# Allegro board ACU7EV.brd
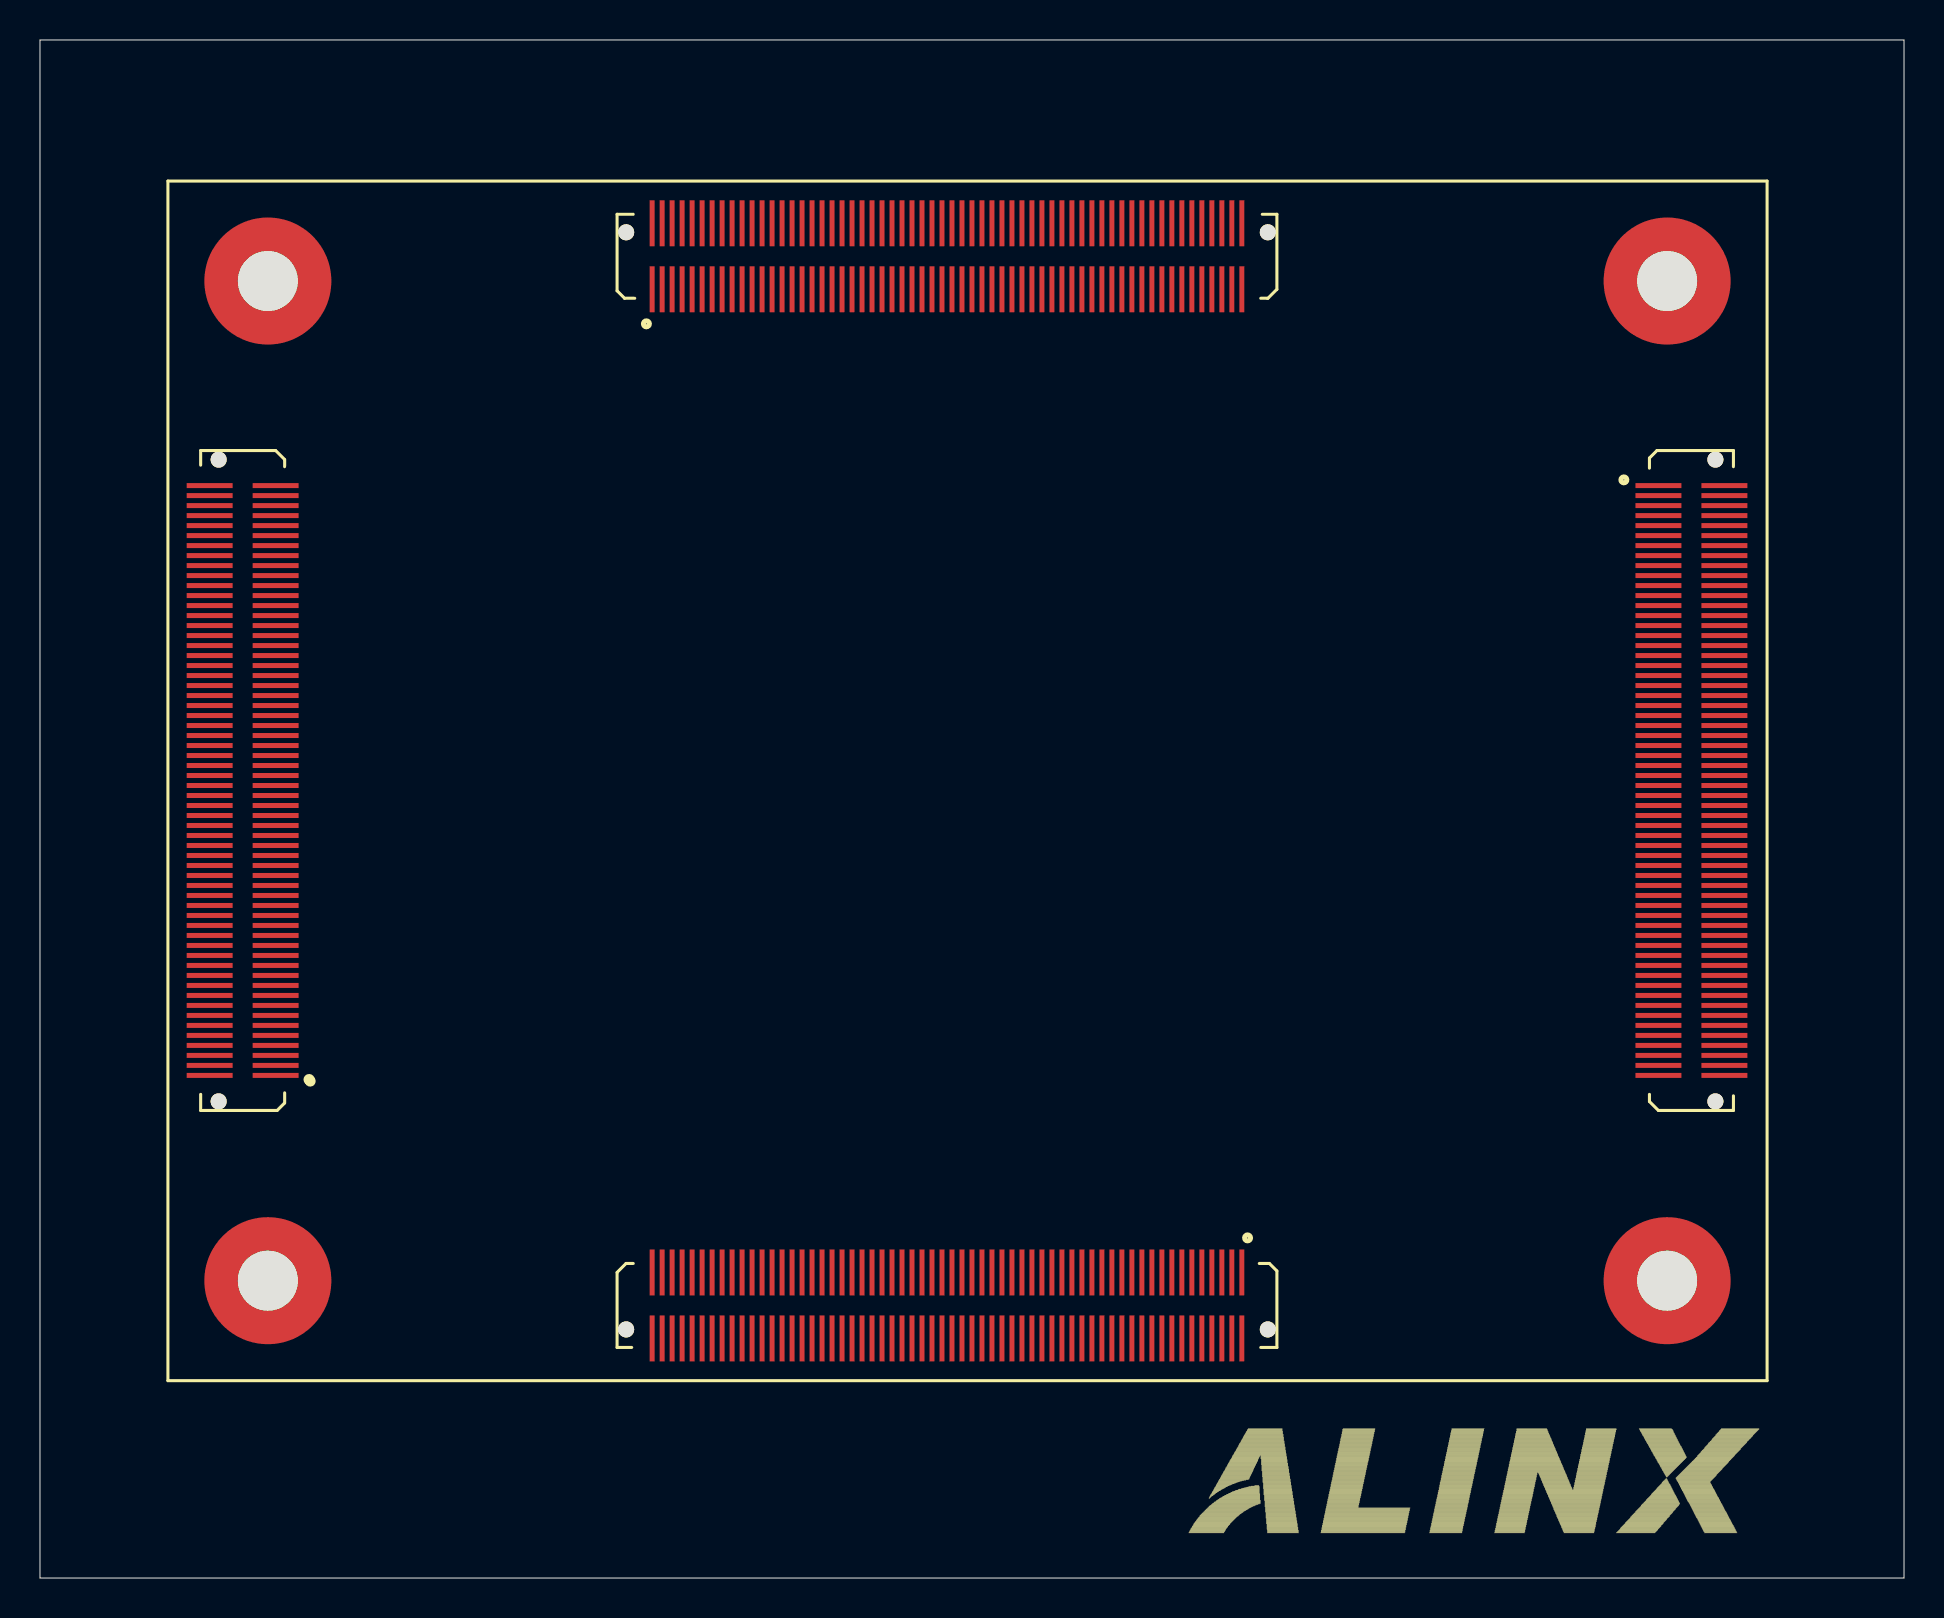
[diagram p0: board, top side]
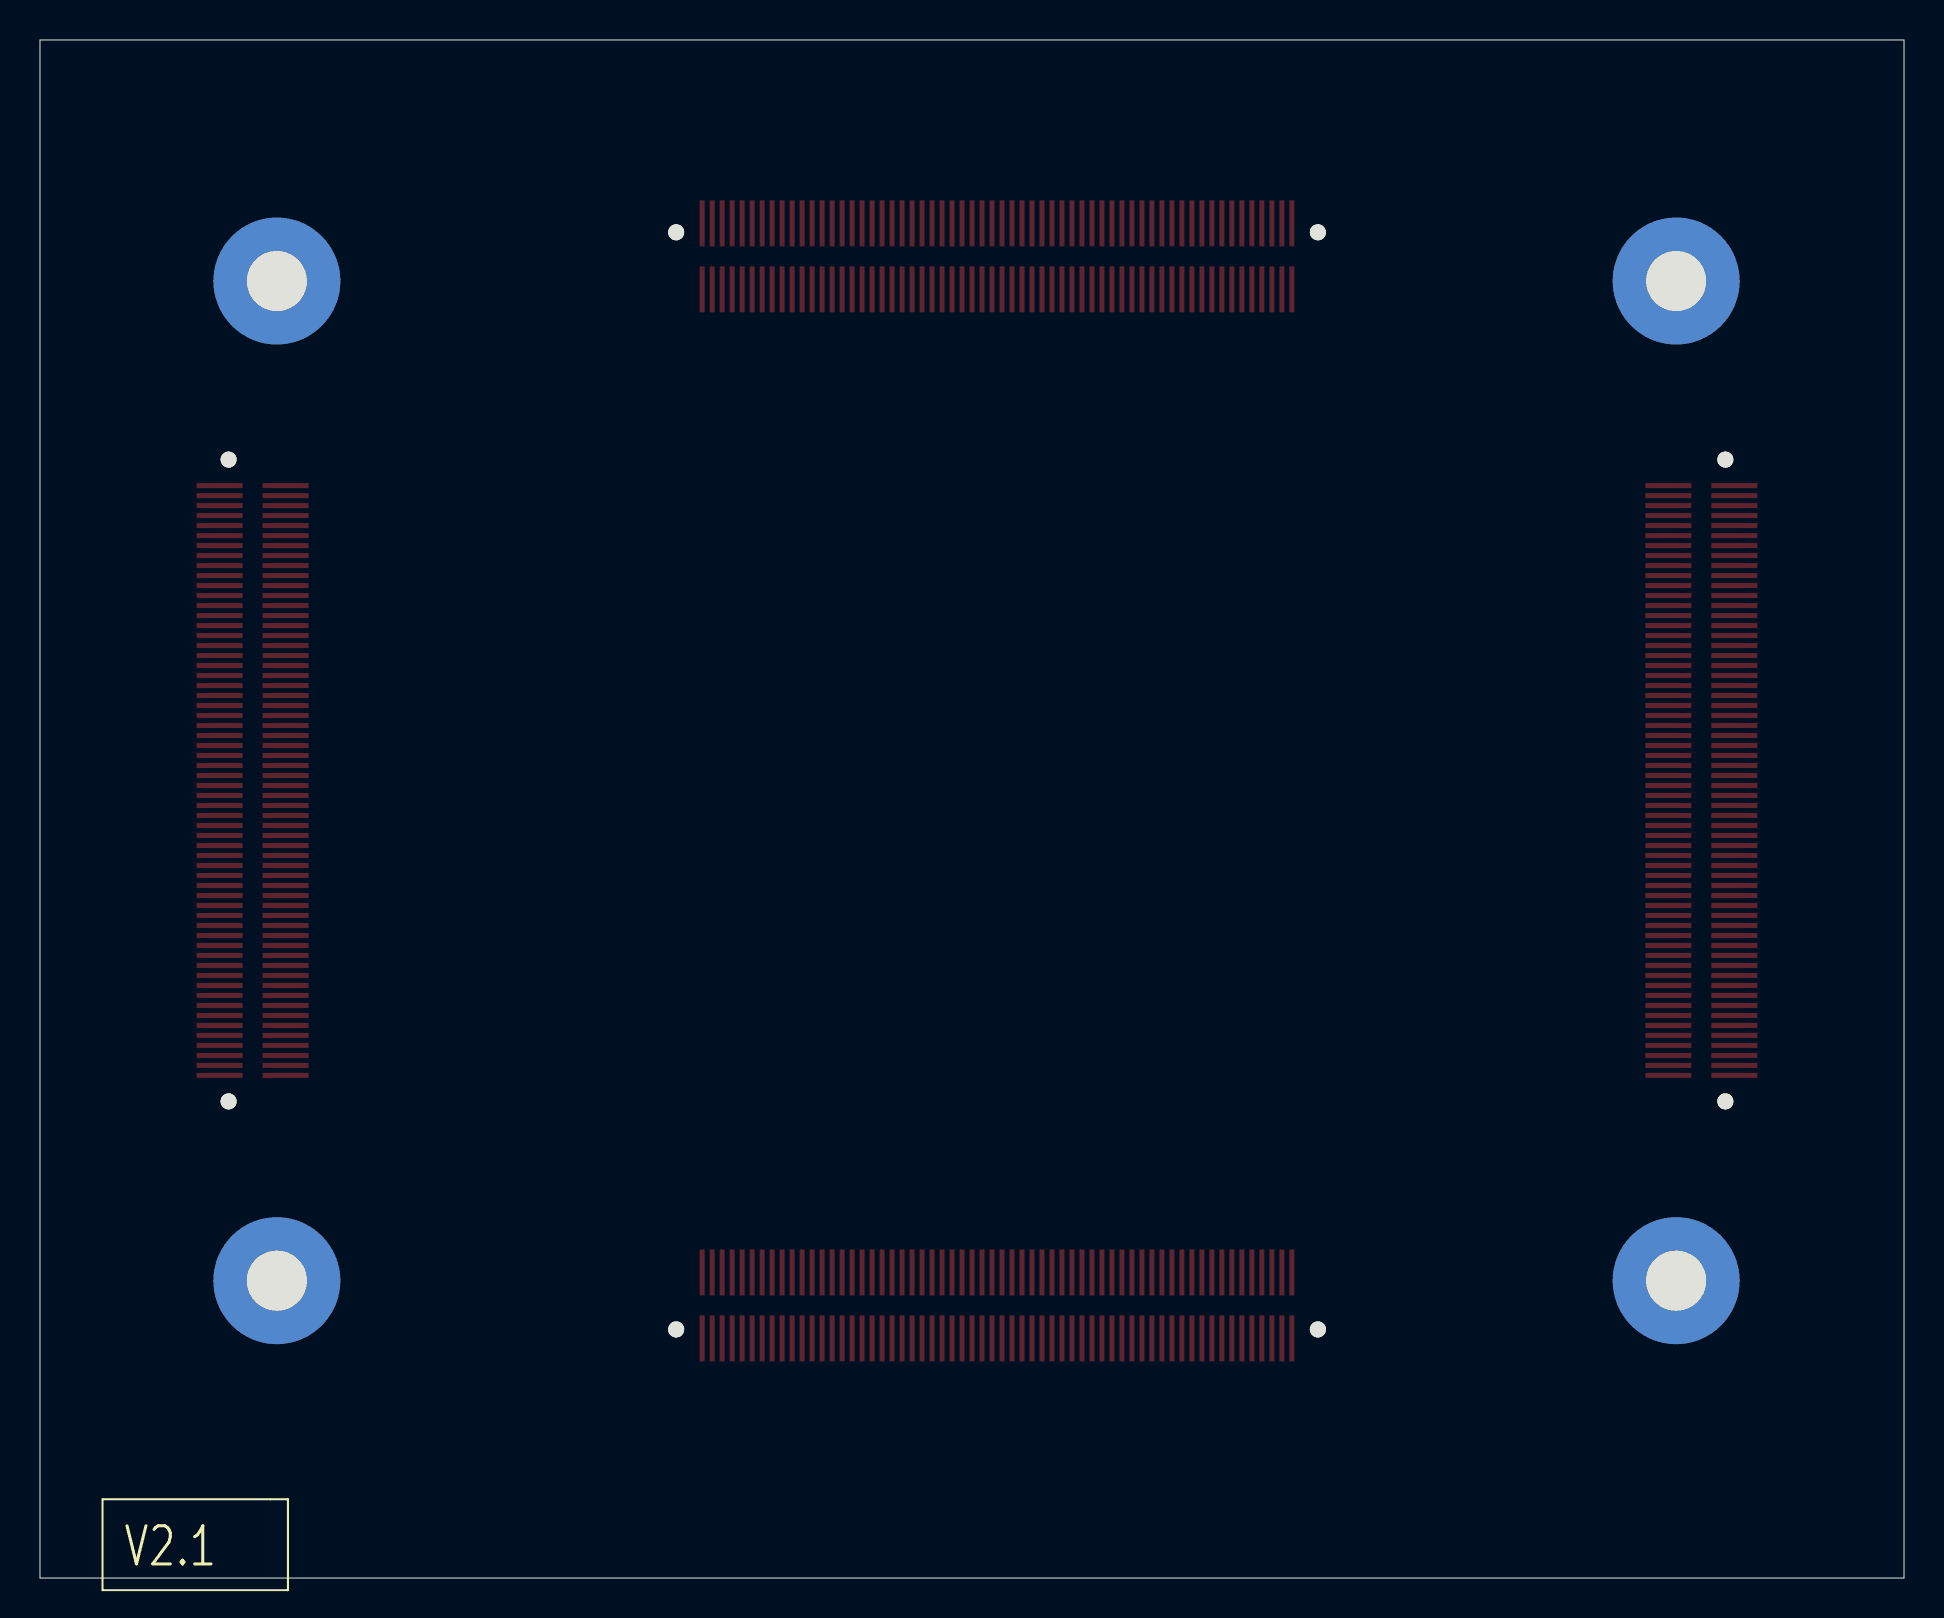
[diagram p1: board, bottom side, seen from below]

Outline 93.25 x 76.93 mm; copper layers: TOP, L2_GND, L3_SIG, L4_GND, L5_VCC, L6_SIG, L7_GND, BOTTOM. Coordinates in mm from the lower left corner of the outline.
Outline path: 0,76.93 93.25,76.93 93.25,0 0,0 0,76.93

## Design rules (mm)
net group 90OHM: nets OTG_D_N OTG_D_P
net group 225_SFP_CLKN: nets 225_SFP_CLKN N24547372
net group 225_SFP_CLKP: nets 225_SFP_CLKP N24547389
net group 485_1: nets 485_A1 485_B1
net group 485_2: nets 485_A2 485_B2
net group 505_DP_CLKN: nets 505_DP_CLKN N25916931
net group 505_DP_CLKP: nets 505_DP_CLKP N25916928
net group 505_PCIE_REFCLK: nets 505_PCIE_REFCLK_N 505_PCIE_REFCLK_P
net group 505_USB_CLKN: nets 505_USB_CLKN N24545544
net group 505_USB_CLKP: nets 505_USB_CLKP N24545542
net group CAN1: nets CAN1_CANH CAN1_CANL
net group CAN2: nets CAN2_CANH CAN2_CANL
net group DPAUX: nets DPAUX_N DPAUX_P
net group FMC_CLK0: nets FMC_CLK0_N FMC_CLK0_P
net group FMC_CLK1: nets FMC_CLK1_N FMC_CLK1_P
net group FMC_DP0_C2M: nets FMC_DP0_C2M_N FMC_DP0_C2M_P
net group FMC_DP0_M2C: nets FMC_DP0_M2C_N FMC_DP0_M2C_P
net group FMC_GBTCLK0_M2C: nets FMC_GBTCLK0_M2C_N FMC_GBTCLK0_M2C_P
net group FMC_LA00_CC: nets FMC_LA00_CC_N FMC_LA00_CC_P
net group FMC_LA01_CC: nets FMC_LA01_CC_N FMC_LA01_CC_P
net group FMC_LA02: nets FMC_LA02_N FMC_LA02_P
net group FMC_LA03: nets FMC_LA03_N FMC_LA03_P
net group FMC_LA04: nets FMC_LA04_N FMC_LA04_P
net group FMC_LA05: nets FMC_LA05_N FMC_LA05_P
net group FMC_LA06: nets FMC_LA06_N FMC_LA06_P
net group FMC_LA07: nets FMC_LA07_N FMC_LA07_P
net group FMC_LA08: nets FMC_LA08_N FMC_LA08_P
net group FMC_LA09: nets FMC_LA09_N FMC_LA09_P
net group FMC_LA10: nets FMC_LA10_N FMC_LA10_P
net group FMC_LA11: nets FMC_LA11_N FMC_LA11_P
net group FMC_LA12: nets FMC_LA12_N FMC_LA12_P
net group FMC_LA13: nets FMC_LA13_N FMC_LA13_P
net group FMC_LA14: nets FMC_LA14_N FMC_LA14_P
net group FMC_LA15: nets FMC_LA15_N FMC_LA15_P
net group FMC_LA16: nets FMC_LA16_N FMC_LA16_P
net group FMC_LA17_CC: nets FMC_LA17_CC_N FMC_LA17_CC_P
net group FMC_LA18_CC: nets FMC_LA18_CC_N FMC_LA18_CC_P
net group FMC_LA19: nets FMC_LA19_N FMC_LA19_P
net group FMC_LA20: nets FMC_LA20_N FMC_LA20_P
net group FMC_LA21: nets FMC_LA21_N FMC_LA21_P
net group FMC_LA22: nets FMC_LA22_N FMC_LA22_P
net group FMC_LA23: nets FMC_LA23_N FMC_LA23_P
net group FMC_LA24: nets FMC_LA24_N FMC_LA24_P
net group FMC_LA25: nets FMC_LA25_N FMC_LA25_P
net group FMC_LA26: nets FMC_LA26_N FMC_LA26_P
net group FMC_LA27: nets FMC_LA27_N FMC_LA27_P
net group FMC_LA28: nets FMC_LA28_N FMC_LA28_P
net group FMC_LA29: nets FMC_LA29_N FMC_LA29_P
net group FMC_LA30: nets FMC_LA30_N FMC_LA30_P
net group FMC_LA31: nets FMC_LA31_N FMC_LA31_P
net group FMC_LA32: nets FMC_LA32_N FMC_LA32_P
net group FMC_LA33: nets FMC_LA33_N FMC_LA33_P
net group GT0_DP_TX: nets GT0_DP_TX_N GT0_DP_TX_P
net group GT0_DP_TX_C: nets GT0_DP_TX_C_N GT0_DP_TX_C_P
net group GT1_DP_TX: nets GT1_DP_TX_N GT1_DP_TX_P
net group GT1_DP_TX_C: nets GT1_DP_TX_C_N GT1_DP_TX_C_P
net group HDMI0_RX_0: nets HDMI0_RX_0N HDMI0_RX_0P
net group HDMI0_RX_1: nets HDMI0_RX_1N HDMI0_RX_1P
net group HDMI0_RX_2: nets HDMI0_RX_2N HDMI0_RX_2P
net group HDMI0_RX_C: nets HDMI0_RX_CN HDMI0_RX_CP
net group HDMI_DRU_CLOCK_N: nets HDMI_DRU_CLOCK_N N25296078
net group HDMI_DRU_CLOCK_P: nets HDMI_DRU_CLOCK_P N25296083
net group HDMI_IN0_RX_0N: nets HDMI_IN0_RX_0N N25309248
net group HDMI_IN0_RX_0P: nets HDMI_IN0_RX_0P N25309240
net group HDMI_IN0_RX_1N: nets HDMI_IN0_RX_1N N25309242
net group HDMI_IN0_RX_1P: nets HDMI_IN0_RX_1P N25309234
net group HDMI_IN0_RX_2N: nets HDMI_IN0_RX_2N N25309236
net group HDMI_IN0_RX_2P: nets HDMI_IN0_RX_2P N25309238
net group HDMI_REC_CLOCK: nets HDMI_REC_CLOCK_N HDMI_REC_CLOCK_P
net group HDMI_TX0_D0N: nets HDMI_TX0_D0N N25297089
net group HDMI_TX0_D0P: nets HDMI_TX0_D0P N25297084
net group HDMI_TX0_D1N: nets HDMI_TX0_D1N N25297081
net group HDMI_TX0_D1P: nets HDMI_TX0_D1P N25297080
net group HDMI_TX0_D2N: nets HDMI_TX0_D2N N25297061
net group HDMI_TX0_D2P: nets HDMI_TX0_D2P N25297074
net group HDMI_TX_LVDS_OUT_N: nets HDMI_TX_LVDS_OUT_N N25297095
net group HDMI_TX_LVDS_OUT_P: nets HDMI_TX_LVDS_OUT_P N25297094
net group MIPI_CLK: nets MIPI_CLK_N MIPI_CLK_P
net group MIPI_LAN0: nets MIPI_LAN0_N MIPI_LAN0_P
net group MIPI_LAN1: nets MIPI_LAN1_N MIPI_LAN1_P
net group PCIE_CLK_N: nets N25208409 PCIE_CLK_N
net group PCIE_CLK_P: nets N25208411 PCIE_CLK_P
net group PCIE_REFCLK: nets PCIE_REFCLK_N PCIE_REFCLK_P
net group PCIE_RX: nets PCIE_RX_N PCIE_RX_P
net group PCIE_TX: nets PCIE_TX_N PCIE_TX_P
net group PCIE_TX0_N: nets N25208362 PCIE_TX0_N
net group PCIE_TX0_P: nets N25208364 PCIE_TX0_P
net group PCIE_TX1_N: nets N25208366 PCIE_TX1_N
net group PCIE_TX1_P: nets N25208368 PCIE_TX1_P
net group PCIE_TX2_N: nets N25208370 PCIE_TX2_N
net group PCIE_TX2_P: nets N25208372 PCIE_TX2_P
net group PCIE_TX3_N: nets N25208374 PCIE_TX3_N
net group PCIE_TX3_P: nets N25208376 PCIE_TX3_P
net group PCIE_TX4_N: nets N25208593 PCIE_TX4_N
net group PCIE_TX4_P: nets N25208595 PCIE_TX4_P
net group PCIE_TX5_N: nets N25208619 PCIE_TX5_N
net group PCIE_TX5_P: nets N25208637 PCIE_TX5_P
net group PCIE_TX6_N: nets N25208653 PCIE_TX6_N
net group PCIE_TX6_P: nets N25208655 PCIE_TX6_P
net group PCIE_TX7_N: nets N25208669 PCIE_TX7_N
net group PCIE_TX7_P: nets N25208689 PCIE_TX7_P
net group PCIE_TX_C: nets PCIE_TX_C_N PCIE_TX_C_P
net group PHY_MDI0_N: nets PHY1_MDI0_N PHY1_MDI0_P
net group RX_DS1: nets RX_DS1_N RX_DS1_P
net group RX_DS2: nets RX_DS2_N RX_DS2_P
net group RX_DS3: nets RX_DS3_N RX_DS3_P
net group RX_DS4: nets RX_DS4_N RX_DS4_P
net group TX_0: nets TX_0N TX_0P
net group TX_1: nets TX_1N TX_1P
net group TX_2: nets TX_2N TX_2P
net group TX_C: nets TX_CN TX_CP
net group TX_DS1: nets TX_DS1_N TX_DS1_P
net group TX_DS1_C: nets TX_DS1_C_N TX_DS1_C_P
net group TX_DS2: nets TX_DS2_N TX_DS2_P
net group TX_DS2_C: nets TX_DS2_C_N TX_DS2_C_P
net group TX_DS3: nets TX_DS3_N TX_DS3_P
net group TX_DS3_C: nets TX_DS3_C_N TX_DS3_C_P
net group TX_DS4: nets TX_DS4_N TX_DS4_P
net group TX_DS4_C: nets TX_DS4_C_N TX_DS4_C_P
net group UART_PL: nets N23663238 N23663240
net group USB: nets N16523963 N16524061
net group USB_D0: nets USB_DM0 USB_DP0
net group USB_D1: nets USB_DM1 USB_DP1
net group USB_D2: nets USB_DM2 USB_DP2
net group USB_D3: nets USB_DM3 USB_DP3
net group USB_D4: nets USB_DM4 USB_DP4
net group USB_RXN_UP: nets USB_RXN_UP USB_SSRXN
net group USB_RXP_UP: nets USB_RXP_UP USB_SSRXP
net group USB_SSTXN: nets USB_SSTXN USB_TXN_UP
net group USB_SSTXP: nets USB_SSTXP USB_TXP_UP
net group Y3: nets N25043434 N25043442
net group Y4: nets N25044098 N25044106
net group Y6: nets N24545912 N24545918
net group Y7: nets N25342525 N25342533
net group Y8: nets N25639880 N25639886
net group ETH_RX: nets PHY1_RXCK PHY1_RXCTL PHY1_RXD0 PHY1_RXD1 PHY1_RXD2 PHY1_RXD3 PHY2_RXCK PHY2_RXCTL PHY2_RXD0 PHY2_RXD1 PHY2_RXD2 PHY2_RXD3
net group ETH_TX: nets PHY1_TXCK PHY1_TXCTL PHY1_TXD0 PHY1_TXD1 PHY1_TXD2 PHY1_TXD3 PHY2_TXCK PHY2_TXCTL PHY2_TXD0 PHY2_TXD1 PHY2_TXD2 PHY2_TXD3
net group HDMI_8T49N241_OUT_N: nets HDMI_8T49N241_OUT_N N25344461 N25641497
net group HDMI_8T49N241_OUT_P: nets HDMI_8T49N241_OUT_P N25344453 N25641494
net group HDMI_IN0_RX_CLKN: nets HDMI_IN0_RX_CLKN
net group HDMI_IN0_RX_CLKP: nets HDMI_IN0_RX_CLKP
net group IO1-DIFF: nets FAN_PWM
net group OTG_DATA: nets USB_CLK USB_DATA0 USB_DATA1 USB_DATA2 USB_DATA3 USB_DATA4 USB_DATA5 USB_DATA6 USB_DATA7 USB_DIR USB_NXT USB_STP
net group PCIE: nets PCIE_RX0_N PCIE_RX0_P PCIE_RX1_N PCIE_RX1_P PCIE_RX2_N PCIE_RX2_P PCIE_RX3_N PCIE_RX3_P PCIE_RX4_N PCIE_RX4_P PCIE_RX5_N PCIE_RX5_P PCIE_RX6_N PCIE_RX6_P PCIE_RX7_N PCIE_RX7_P
net group PHY_MDI: nets PHY1_MDI1_N PHY1_MDI1_P PHY1_MDI2_N PHY1_MDI2_P PHY1_MDI3_N PHY1_MDI3_P PHY2_MDI0_N PHY2_MDI0_P PHY2_MDI1_N PHY2_MDI1_P PHY2_MDI2_N PHY2_MDI2_P PHY2_MDI3_N PHY2_MDI3_P
net group SD_D: nets SD_CLK SD_CMD SD_D0 SD_D1 SD_D2 SD_D3
net group SPF-DIFF: nets SFP1_RX_N SFP1_RX_P SFP1_TX_N SFP1_TX_P SFP2_RX_N SFP2_RX_P SFP2_TX_N SFP2_TX_P
nets with their own width: min track width 0.254; nets +3.3V

## Placement (name value [footprint] x y rotation side)
J29  -  [AXK6A2337YG]  45.37 66.11 0 top
J30  -  [AXK6A2337YG]  82.61 39.89 270 top
J31  -  [AXK6A2337YG]  45.37 13.63 180 top
J32  -  [AXK6A2337YG]  10.14 39.89 90 top
NOREF  -  [unnamed]  46.4 39.87 180 top
NOREF#2  -  [#2]  160.62 -1.73 90 top
NOREF#3  -  [#2]  -53.24 95.75 0 top

## Library data of the parts
J29-J32 = CONN SOCKET 60x2_0

## Footprints (pads in the part's own frame, mm; a bottom-side part is the same pattern mirrored in y, then rotated)
AXK6A2337YG
  round 0.8 hole 0.8 unplated: (-16.05,1.2) (16.05,1.2)
  rect 0.25x2.3 smd: 1(-14.75,-1.65) 2(-14.75,1.65) 3(-14.25,-1.65) 4(-14.25,1.65) 5(-13.75,-1.65) 6(-13.75,1.65) 7(-13.25,-1.65) 8(-13.25,1.65) 9(-12.75,-1.65) 10(-12.75,1.65) 11(-12.25,-1.65) 12(-12.25,1.65) 13(-11.75,-1.65) 14(-11.75,1.65) 15(-11.25,-1.65) 16(-11.25,1.65) 17(-10.75,-1.65) 18(-10.75,1.65) 19(-10.25,-1.65) 20(-10.25,1.65) 21(-9.75,-1.65) 22(-9.75,1.65) 23(-9.25,-1.65) 24(-9.25,1.65) 25(-8.75,-1.65) 26(-8.75,1.65) 27(-8.25,-1.65) 28(-8.25,1.65) 29(-7.75,-1.65) 30(-7.75,1.65) 31(-7.25,-1.65) 32(-7.25,1.65) 33(-6.75,-1.65) 34(-6.75,1.65) 35(-6.25,-1.65) 36(-6.25,1.65) 37(-5.75,-1.65) 38(-5.75,1.65) 39(-5.25,-1.65) 40(-5.25,1.65) 41(-4.75,-1.65) 42(-4.75,1.65) 43(-4.25,-1.65) 44(-4.25,1.65) 45(-3.75,-1.65) 46(-3.75,1.65) 47(-3.25,-1.65) 48(-3.25,1.65) 49(-2.75,-1.65) 50(-2.75,1.65) 51(-2.25,-1.65) 52(-2.25,1.65) 53(-1.75,-1.65) 54(-1.75,1.65) 55(-1.25,-1.65) 56(-1.25,1.65) 57(-0.75,-1.65) 58(-0.75,1.65) 59(-0.25,-1.65) 60(-0.25,1.65) 61(0.25,-1.65) 62(0.25,1.65) 63(0.75,-1.65) 64(0.75,1.65) 65(1.25,-1.65) 66(1.25,1.65) 67(1.75,-1.65) 68(1.75,1.65) 69(2.25,-1.65) 70(2.25,1.65) 71(2.75,-1.65) 72(2.75,1.65) 73(3.25,-1.65) 74(3.25,1.65) 75(3.75,-1.65) 76(3.75,1.65) 77(4.25,-1.65) 78(4.25,1.65) 79(4.75,-1.65) 80(4.75,1.65) 81(5.25,-1.65) 82(5.25,1.65) 83(5.75,-1.65) 84(5.75,1.65) 85(6.25,-1.65) 86(6.25,1.65) 87(6.75,-1.65) 88(6.75,1.65) 89(7.25,-1.65) 90(7.25,1.65) 91(7.75,-1.65) 92(7.75,1.65) 93(8.25,-1.65) 94(8.25,1.65) 95(8.75,-1.65) 96(8.75,1.65) 97(9.25,-1.65) 98(9.25,1.65) 99(9.75,-1.65) 100(9.75,1.65) 101(10.25,-1.65) 102(10.25,1.65) 103(10.75,-1.65) 104(10.75,1.65) 105(11.25,-1.65) 106(11.25,1.65) 107(11.75,-1.65) 108(11.75,1.65) 109(12.25,-1.65) 110(12.25,1.65) 111(12.75,-1.65) 112(12.75,1.65) 113(13.25,-1.65) 114(13.25,1.65) 115(13.75,-1.65) 116(13.75,1.65) 117(14.25,-1.65) 118(14.25,1.65) 119(14.75,-1.65) 120(14.75,1.65)
unnamed
  round 6.35 hole 3: 1(-35,25) 2(35,25) 3(-35,-25) 4(35,-25)

## Nets
+12V: J29.1 J29.2(61) J29.3(2) J29.4(62) J29.5(3) J29.6(63) J29.7(4) J29.8(64) J29.9(5) J29.10(65) J29.11(6) J29.12(66)
GND: J29.13(7) J29.14(67) J29.19(10) J29.20(70) J29.29(15) J29.30(75) J29.39(20) J29.40(80) J29.49(25) J29.50(85) J29.59(30) J29.60(90) J29.69(35) J29.70(95) J29.79(40) J29.80(100) J29.89(45) J29.90(105) J29.99(50) J29.100(110) J30.5(3) J30.6(63) J30.15(8) J30.16(68) J30.25(13) J30.26(73) J30.35(18) J30.36(78) J30.45(23) J30.46(83) J30.55(28) J30.56(88) J30.65(33) J30.66(93) J30.75(38) J30.76(98) J30.85(43) J30.86(103) J30.91(46) J30.92(106) J30.97(49) J30.98(109) J30.103(52) J30.104(112) J30.109(55) J30.110(115) J30.115(58) J30.116(118) J31.11(6) J31.12(66) J31.21(11) J31.22(71) J31.31(16) J31.32(76) J31.41(21) J31.42(81) J31.51(26) J31.52(86) J31.61(31) J31.62(91) J31.71(36) J31.72(96) J31.81(41) J31.82(101) J31.91(46) J31.92(106) J31.101(51) J31.102(111) J31.111(56) J31.112(116) J32.5(3) J32.6(63) J32.11(6) J32.12(66) J32.17(9) J32.18(69) J32.23(12) J32.24(72) J32.29(15) J32.30(75) J32.35(18) J32.36(78) J32.41(21) J32.42(81) J32.47(24) J32.48(84) J32.53(27) J32.54(87) J32.59(30) J32.60(90) J32.65(33) J32.66(93) J32.71(36) J32.72(96) J32.77(39) J32.78(99) J32.83(42) J32.84(102) J32.89(45) J32.90(105) J32.95(48) J32.96(108) J32.101(51) J32.102(111) J32.107(54) J32.108(114) J32.113(57) J32.114(117) J32.119(60) J32.120
VBAT_IN: J31.2(61)
8T49N241_INT_ALM: J29.41(21)
8T49N241_LOL: J29.43(22)
8T49N241_RST: J29.37(19)
223_CLK1_N: J32.27(14)
223_CLK1_P: J32.25(13)
224_CLK0_N: J32.58(89)
224_CLK0_P: J32.56(88)
224_CLK1_N: J32.57(29)
224_CLK1_P: J32.55(28)
225_RX2_N: J32.81(41)
225_RX2_P: J32.79(40)
225_SFP_CLKN: J32.64(92)
225_SFP_CLKP: J32.62(91)
225_TX2_N: J32.87(44)
225_TX2_P: J32.85(43)
226_RX3_N: J32.99(50)
226_RX3_P: J32.97(49)
226_TX3_N: J32.100(110)
226_TX3_P: J32.98(109)
505_CLK3_N: J30.118(119)
505_CLK3_P: J30.120
505_DP_CLKN: J30.117(59)
505_DP_CLKP: J30.119(60)
505_PCIE_REFCLK_N: J30.111(56)
505_PCIE_REFCLK_P: J30.113(57)
505_RX2_N: J30.93(47)
505_RX2_P: J30.95(48)
505_RX3_N: J30.87(44)
505_RX3_P: J30.89(45)
505_USB_CLKN: J30.112(116)
505_USB_CLKP: J30.114(117)
B64_L6_N: J31.69(35)
B64_L6_P: J31.67(34)
B64_L9_N: J31.66(93)
B64_L9_P: J31.64(92)
B64_L10_N: J31.99(50)
B64_L10_P: J31.97(49)
B64_L22_N: J31.115(58)
B64_L22_P: J31.113(57)
B65_L4_N: J31.44(82)
B65_L4_P: J31.46(83)
B65_L6_N: J31.34(77)
B65_L6_P: J31.36(78)
B65_L7_N: J31.24(72)
B65_L7_P: J31.26(73)
B65_L9_N: J31.58(89)
B65_L9_P: J31.60(90)
B65_L11_N: J31.48(84)
B65_L11_P: J31.50(85)
B65_L15_N: J31.43(22)
B65_L15_P: J31.45(23)
B65_L16_N: J31.14(67)
B65_L16_P: J31.16(68)
B65_L17_N: J31.38(79)
B65_L17_P: J31.40(80)
B65_L18_N: J31.8(64)
B65_L18_P: J31.10(65)
B65_L20_N: J31.47(24)
B65_L20_P: J31.49(25)
B65_L21_N: J31.28(74)
B65_L21_P: J31.30(75)
B65_L22_N: J31.57(29)
B65_L22_P: J31.59(30)
B65_L23_N: J31.53(27)
B65_L23_P: J31.55(28)
B87_L3_N: J29.52(86)
B87_L3_P: J29.54(87)
B87_L4_N: J29.71(36)
B87_L4_P: J29.73(37)
B87_L6_N: J29.66(93)
B87_L7_N: J29.62(91)
B87_L7_P: J29.64(92)
B87_L10_N: J29.46(83)
B87_L10_P: J29.48(84)
B87_L12_N: J29.56(88)
B87_L12_P: J29.58(89)
CAM_CLK: J29.57(29)
CAM_GPIO: J29.55(28)
CAM_SCL: J29.53(27)
CAM_SDA: J29.51(26)
CLK_REC_SCL: J29.45(23)
CLK_REC_SDA: J29.47(24)
DP_AUX_IN_MIO30: J29.114(117)
DP_AUX_OUT_MIO27: J29.105(53)
DP_HPD_MIO28: J29.119(60)
DP_OE_MIO29: J29.112(116)
FAN_PWM: J29.35(18)
FMC_CLK0_N: J30.7(4)
FMC_CLK0_P: J30.9(5)
FMC_CLK1_N: J31.70(95)
FMC_CLK1_P: J31.68(94)
FMC_DP0_C2M_N: J32.75(38)
FMC_DP0_C2M_P: J32.73(37)
FMC_DP0_M2C_N: J32.69(35)
FMC_DP0_M2C_P: J32.67(34)
FMC_LA00_CC_N: J30.13(7)
FMC_LA00_CC_P: J30.11(6)
FMC_LA01_CC_N: J30.41(21)
FMC_LA01_CC_P: J30.43(22)
FMC_LA02_N: J30.3(2)
FMC_LA02_P: J30.1
FMC_LA03_N: J30.17(9)
FMC_LA03_P: J30.19(10)
FMC_LA04_N: J30.23(12)
FMC_LA04_P: J30.21(11)
FMC_LA05_N: J30.37(19)
FMC_LA05_P: J30.39(20)
FMC_LA06_N: J29.96(108)
FMC_LA06_P: J29.98(109)
FMC_LA07_N: J29.95(48)
FMC_LA07_P: J29.97(49)
FMC_LA08_N: J29.92(106)
FMC_LA08_P: J29.94(107)
FMC_LA09_N: J29.91(46)
FMC_LA09_P: J29.93(47)
FMC_LA10_N: J29.86(103)
FMC_LA10_P: J29.88(104)
FMC_LA11_N: J29.81(41)
FMC_LA11_P: J29.83(42)
FMC_LA12_N: J29.85(43)
FMC_LA12_P: J29.87(44)
FMC_LA13_N: J29.82(101)
FMC_LA13_P: J29.84(102)
FMC_LA14_N: J29.76(98)
FMC_LA14_P: J29.78(99)
FMC_LA15_N: J29.75(38)
FMC_LA15_P: J29.77(39)
FMC_LA16_N: J29.72(96)
FMC_LA16_P: J29.74(97)
FMC_LA17_CC_N: J31.76(98)
FMC_LA17_CC_P: J31.74(97)
FMC_LA18_CC_N: J31.96(108)
FMC_LA18_CC_P: J31.94(107)
FMC_LA19_N: J31.86(103)
FMC_LA19_P: J31.84(102)
FMC_LA20_N: J31.80(100)
FMC_LA20_P: J31.78(99)
FMC_LA21_N: J31.79(40)
FMC_LA21_P: J31.77(39)
FMC_LA22_N: J31.75(38)
FMC_LA22_P: J31.73(37)
FMC_LA23_N: J31.90(105)
FMC_LA23_P: J31.88(104)
FMC_LA24_N: J31.100(110)
FMC_LA24_P: J31.98(109)
FMC_LA25_N: J31.95(48)
FMC_LA25_P: J31.93(47)
FMC_LA26_N: J31.89(45)
FMC_LA26_P: J31.87(44)
FMC_LA27_N: J31.85(43)
FMC_LA27_P: J31.83(42)
FMC_LA28_N: J31.109(55)
FMC_LA28_P: J31.107(54)
FMC_LA29_N: J31.105(53)
FMC_LA29_P: J31.103(52)
FMC_LA30_N: J31.110(115)
FMC_LA30_P: J31.108(114)
FMC_LA31_N: J31.106(113)
FMC_LA31_P: J31.104(112)
FMC_LA32_N: J31.120
FMC_LA32_P: J31.118(119)
FMC_LA33_N: J31.116(118)
FMC_LA33_P: J31.114(117)
FMC_PRSNT: J29.44(82)
FPGA_DONE: J30.63(32)
FPGA_TDO: J30.83(42)
GT0_DP_TX_N: J30.88(104)
GT0_DP_TX_P: J30.90(105)
GT1_DP_TX_N: J30.94(107)
GT1_DP_TX_P: J30.96(108)
HDMI_8T49N241_OUT_N: J32.94(107)
HDMI_8T49N241_OUT_P: J32.92(106)
HDMI_DRU_CLOCK_N: J32.63(32)
HDMI_DRU_CLOCK_P: J32.61(31)
HDMI_IN0_RX_0N: J32.117(59)
HDMI_IN0_RX_0P: J32.115(58)
HDMI_IN0_RX_1N: J32.111(56)
HDMI_IN0_RX_1P: J32.109(55)
HDMI_IN0_RX_2N: J32.105(53)
HDMI_IN0_RX_2P: J32.103(52)
HDMI_IN0_RX_CLKN: J32.93(47)
HDMI_IN0_RX_CLKP: J32.91(46)
HDMI_REC_CLOCK_N: J31.65(33)
HDMI_REC_CLOCK_P: J31.63(32)
HDMI_RX_DSCL: J29.21(11)
HDMI_RX_DSDA: J29.17(9)
HDMI_RX_HPD: J29.15(8)
HDMI_RX_PWR_DET: J29.23(12)
HDMI_SCL_CTL: J29.27(14)
HDMI_SDA_CTL: J29.25(13)
HDMI_TX0_D0N: J32.118(119)
HDMI_TX0_D0P: J32.116(118)
HDMI_TX0_D1N: J32.112(116)
HDMI_TX0_D1P: J32.110(115)
HDMI_TX0_D2N: J32.106(113)
HDMI_TX0_D2P: J32.104(112)
HDMI_TX0_DDC_SCL: J29.22(71)
HDMI_TX0_DDC_SDA: J29.18(69)
HDMI_TX0_HPD: J29.16(68)
HDMI_TX0_OUT_OE: J29.24(72)
HDMI_TX_LVDS_OUT_N: J31.119(60)
HDMI_TX_LVDS_OUT_P: J31.117(59)
JTAG_TCK: J30.77(39)
JTAG_TDI: J30.79(40)
JTAG_TMS: J30.81(41)
MIPI_CLK_N: J31.54(87)
MIPI_CLK_P: J31.56(88)
MIPI_LAN0_N: J31.4(62)
MIPI_LAN0_P: J31.6(63)
MIPI_LAN1_N: J31.18(69)
MIPI_LAN1_P: J31.20(70)
PCIE_CLK_N: J32.28(74)
PCIE_CLK_P: J32.26(73)
PCIE_RSTN: J31.3(2)
PCIE_RSTN_MIO37: J29.110(115)
PCIE_RX0_N: J32.3(2)
PCIE_RX0_P: J32.1
PCIE_RX1_N: J32.9(5)
PCIE_RX1_P: J32.7(4)
PCIE_RX2_N: J32.15(8)
PCIE_RX2_P: J32.13(7)
PCIE_RX3_N: J32.21(11)
PCIE_RX3_P: J32.19(10)
PCIE_RX4_N: J32.33(17)
PCIE_RX4_P: J32.31(16)
PCIE_RX5_N: J32.39(20)
PCIE_RX5_P: J32.37(19)
PCIE_RX6_N: J32.45(23)
PCIE_RX6_P: J32.43(22)
PCIE_RX7_N: J32.51(26)
PCIE_RX7_P: J32.49(25)
PCIE_RX_N: J30.105(53)
PCIE_RX_P: J30.107(54)
PCIE_TX0_N: J32.4(62)
PCIE_TX0_P: J32.2(61)
PCIE_TX1_N: J32.10(65)
PCIE_TX1_P: J32.8(64)
PCIE_TX2_N: J32.16(68)
PCIE_TX2_P: J32.14(67)
PCIE_TX3_N: J32.22(71)
PCIE_TX3_P: J32.20(70)
PCIE_TX4_N: J32.34(77)
PCIE_TX4_P: J32.32(76)
PCIE_TX5_N: J32.40(80)
PCIE_TX5_P: J32.38(79)
PCIE_TX6_N: J32.46(83)
PCIE_TX6_P: J32.44(82)
PCIE_TX7_N: J32.52(86)
PCIE_TX7_P: J32.50(85)
PCIE_TX_N: J30.106(113)
PCIE_TX_P: J30.108(114)
PHY1_MDC: J30.82(101)
PHY1_MDIO: J30.84(102)
PHY1_RXCK: J30.80(100)
PHY1_RXCTL: J30.78(99)
PHY1_RXD0: J30.74(97)
PHY1_RXD1: J30.72(96)
PHY1_RXD2: J30.70(95)
PHY1_RXD3: J30.68(94)
PHY1_TXCK: J30.62(91)
PHY1_TXCTL: J30.64(92)
PHY1_TXD0: J30.52(86)
PHY1_TXD1: J30.54(87)
PHY1_TXD2: J30.58(89)
PHY1_TXD3: J30.60(90)
PHY2_MDC: J31.13(7)
PHY2_MDIO: J31.5(3)
PHY2_RESET: J31.7(4)
PHY2_RXCK: J31.9(5)
PHY2_RXCTL: J31.15(8)
PHY2_RXD0: J31.17(9)
PHY2_RXD1: J31.19(10)
PHY2_RXD2: J31.23(12)
PHY2_RXD3: J31.25(13)
PHY2_TXCK: J31.35(18)
PHY2_TXCTL: J31.27(14)
PHY2_TXD0: J31.39(20)
PHY2_TXD1: J31.37(19)
PHY2_TXD2: J31.29(15)
PHY2_TXD3: J31.33(17)
PL_485_DE1: J29.32(76)
PL_485_DE2: J29.38(79)
PL_485_RXD1: J29.28(74)
PL_485_RXD2: J29.36(78)
PL_485_TXD1: J29.34(77)
PL_485_TXD2: J29.42(81)
PL_KEY: J29.61(31)
PL_LED: J29.63(32)
PL_UART_RX: J29.65(33)
PL_UART_TX: J29.67(34)
POWER_SW: J31.1
PS_CAN1_RX: J29.120
PS_CAN1_TX: J29.113(57)
PS_CAN2_RX: J29.117(59)
PS_CAN2_TX: J29.109(55)
PS_IIC0_SCL: J29.116(118)
PS_IIC0_SDA: J29.106(113)
PS_KEY: J29.115(58)
PS_LED: J29.111(56)
PS_MIO26: J29.103(52)
PS_MIO31: J29.107(54)
PS_MIO36: J29.108(114)
PS_MODE0: J30.73(37)
PS_MODE1: J30.71(36)
PS_MODE2: J30.69(35)
PS_MODE3: J30.67(34)
PS_POR_B: J30.61(31)
PS_UART_RX: J29.118(119)
PS_UART_TX: J29.101(51)
PWRGD: J29.68(94)
SD_CD: J30.18(69)
SD_CLK: J30.14(67)
SD_CMD: J30.8(64)
SD_D0: J30.10(65)
SD_D1: J30.12(66)
SD_D2: J30.2(61)
SD_D3: J30.4(62)
SFP1_LOSS: J29.33(17)
SFP1_RX_N: J32.70(95)
SFP1_RX_P: J32.68(94)
SFP1_TX_N: J32.76(98)
SFP1_TX_P: J32.74(97)
SFP2_LOSS: J29.31(16)
SFP2_RX_N: J32.82(101)
SFP2_RX_P: J32.80(100)
SFP2_TX_N: J32.88(104)
SFP2_TX_P: J32.86(103)
SFP_TX_DIS: J29.26(73)
USB_CLK: J30.28(74)
USB_DATA0: J30.32(76)
USB_DATA1: J30.34(77)
USB_DATA2: J30.38(79)
USB_DATA3: J30.40(80)
USB_DATA4: J30.42(81)
USB_DATA5: J30.44(82)
USB_DATA6: J30.48(84)
USB_DATA7: J30.50(85)
USB_DIR: J30.24(72)
USB_NXT: J30.30(75)
USB_RESET_N: J29.104(112)
USB_SSRXN: J30.99(50)
USB_SSRXP: J30.101(51)
USB_SSTXN: J30.100(110)
USB_SSTXP: J30.102(111)
USB_STP: J30.22(71)

Pads without a net: J29 102; J30 20 27 29 31 33 47 49 51 53 57 59; NOREF 1 2 3 4

## Text on the board
Ref Des/Silkscreen Bottom: CAN1_H | CAN1_L | CAN2_H | CAN2_L | 485_B1 | 485_A1 | GND | 485_B2 | 485_A2 | V2.1
User.45: FIGURE | SIZE | 8.0 | 19.69 | 27.56 | 35.0 | 36.0 | 40.0 | 42.0 | 43.31 | 51.18 | 62.0 | 70.87 | 90.55 | 106.3 | 118.11 | 125.0 | 31.5 | 43.0 | 50.0 | 53.15 | 63.0 | 129.92 | 55.12x23.62 | 55.12x31.5 | 62.0x39.37 | 74.8x31.5 | 78.74x27.56 | 94.49x31.5 | 102.36x31.5 | DRILL CHART: TOP to BOTTOM | ALL UNITS ARE IN MILS | TOLERANCE | +3.0/-3.0 | +0.0/-0.0 | PLATED | NON-PLATED | QTY | 1702 | 10 | 36 | 2 | 20 | 12 | 8 | 4 | 1
